# EAGLE board Adafruit BMP388 (EAGLE 9.1.1)
REV: A
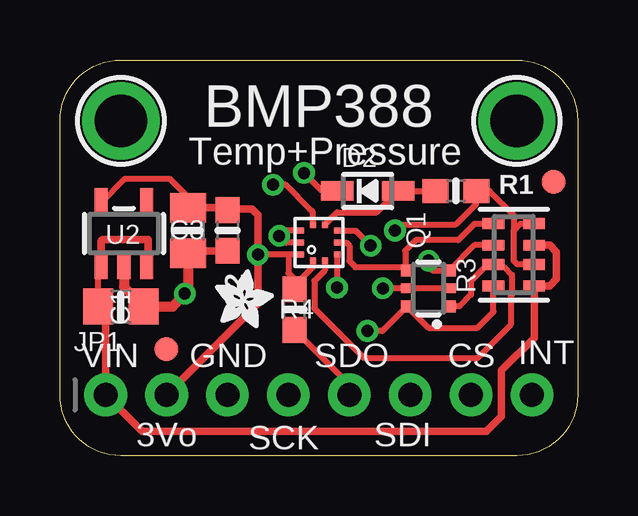
[diagram p0: board, top side]
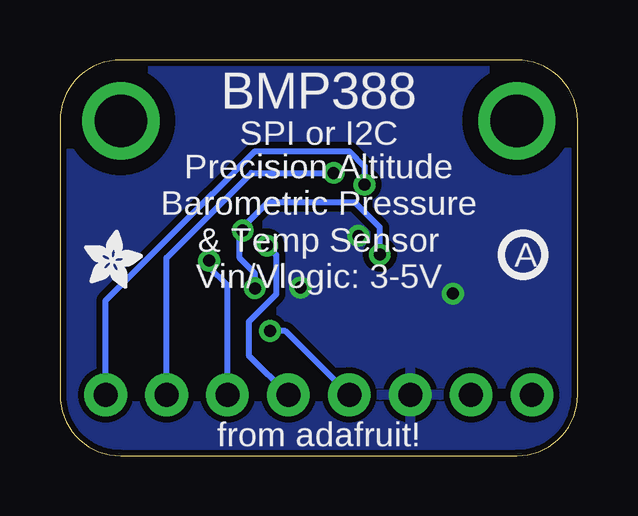
[diagram p1: board, bottom side, seen from below]

Size 21.59 x 16.51 mm. Coordinates in mm from the lower left corner, seen from the top.
Outline: 2.54,16.51 19.05,16.51 arc-90 21.59,13.97 21.59,2.54 arc-90 19.05,0 2.54,0 arc-90 0,2.54 0,13.97 arc-90 2.54,16.51
Copper layers (1*16): Top 0.035mm / dielectric 1.5mm / Bottom 0.035mm
Design rules "adafruit *": minimum track width 8mil, minimum drill 15.5mil, track to track 8mil, track to pad 8mil, pad to pad 8mil, via to via 8mil, smd to smd 8mil, copper to edge 10mil, drill to drill 8mil, minimum pad ring 10mil, minimum via ring 8mil, stop-mask expansion 2mil, vias tented up to drill 20mil, thermal gap 10mil

## Footprints (pad centres in the part's own frame; a part is rotated, then mirrored left to right if it is on the bottom)
0805-NO = smd 1.24 x 1.5: 1 -0.95,0; 2 0.95,0
0603-NO = smd 1.075 x 1: 1 -0.85,0; 2 0.85,0
SOD-323 = smd 1.35 x 0.8: A 1.27,0; C -1.27,0
BMP388 = smd 0.25 x 0.275: 1 0.25,0.75; 2 -0.25,0.75; 6 -0.25,-0.75; 7 0.25,-0.75 | smd 0.275 x 0.25: 3 -0.762,0.5; 4 -0.762,0; 5 -0.762,-0.5; 8 0.762,-0.5; 9 0.762,0; 10 0.762,0.5
1X08_ROUND_70 = drill 1 pad 1.778: 1 -8.89,0; 2 -6.35,0; 3 -3.81,0; 4 -1.27,0; 5 1.27,0; 6 3.81,0; 7 6.35,0; 8 8.89,0
SOT363 = smd 0.5 x 0.5: 1 -0.75,-0.9; 3 0.75,-0.9; 4 0.75,0.9; 6 -0.75,0.9 | smd 0.4 x 0.5: 2 0,-0.9; 5 0,0.9
RESPACK_4X0603 = smd 0.45 x 0.9: 1 -1.3,-0.85; 2 -0.4,-0.85; 3 0.4,-0.85; 4 1.3,-0.85; 5 1.3,0.85; 6 0.4,0.85; 7 -0.4,0.85; 8 -1.3,0.85
SOT23-5 = smd 0.55 x 1.2: 1 -0.95,-1.3; 2 0,-1.3; 3 0.95,-1.3; 4 0.95,1.3; 5 -0.95,1.3
FIDUCIAL_1MM = smd 1 x 1: 1 0,0
MOUNTINGHOLE_2.0_PLATED = drill 2.2 pad 3: P$1 0,0

## Placement (x,y rotation side)
C1  10uF  [0805-NO]  2.54,6.22 0 top
C2  0.1uF  [0603-NO]  6.99,9.4 270 top
C3  10uF  [0805-NO]  5.33,9.4 270 top
D2  1N4148  [SOD-323]  12.83,11.05 0 top
IC1  BMP388  [BMP388]  10.79,8.89 180 top
JP1  [1X08_ROUND_70]  10.79,2.54 0 top
Q1  2N7002D  [SOT363]  15.37,6.99 90 top
R1  10K  [0603-NO]  16.51,11.05 0 top
R3  10K  [RESPACK_4X0603]  18.92,8.38 90 top
R4  10K  [0603-NO]  9.78,6.1 90 top
U2  MIC5225-3.3  [SOT23-5]  2.67,9.27 0 top
U$2  [ADAFRUIT_2.5MM]  20.57,6.99 0 bottom
U$5  FIDUCIAL_1MM  [FIDUCIAL_1MM]  4.45,4.45 0 top
U$6  [ADAFRUIT_2.5MM]  6.48,5.33 0 top
U$7  MOUNTINGHOLE2.0  [MOUNTINGHOLE_2.0_PLATED]  2.54,13.97 0 top
U$8  MOUNTINGHOLE2.0  [MOUNTINGHOLE_2.0_PLATED]  19.05,13.97 0 top
U$15  FIDUCIAL_1MM  [FIDUCIAL_1MM]  20.57,11.43 0 top
U$20  [PCBFEAT-REV-040]  2.29,8.38 0 bottom

## Library data of the parts
C1-C3 D2 IC1 JP1 Q1 R1 R3 R4 U2 U$2 U$6 U$20 = microbuilder
U$5 U$7 U$8 U$15 = microbuilder; BOM: EXCLUDE

## Nets
3.3V: C2.1 C3.1 IC1.1 IC1.10 JP1.2 Q1.2 Q1.5 R1.2 R3.2 R3.4 R4.2 U2.5
CS: D2.C JP1.7
CS_3V: D2.A IC1.6 R1.1
GND: C1.2 C2.2 C3.2 IC1.3 IC1.8 IC1.9 JP1.3 U2.2
INT: IC1.7 JP1.8
SCK/SCL: JP1.4 Q1.6 R3.8
SCK_3V: IC1.2 Q1.1 R3.7
SDI/SDA: JP1.6 Q1.3 R3.6
SDI_3V: IC1.4 Q1.4 R3.5
SDO/ADR: IC1.5 JP1.5 R4.1
VIN: C1.1 JP1.1 R3.1 R3.3 U2.1 U2.3

## Tracks (layer width: path | path; a pad name or v marks a point on that pad's centre or on a via)
3.3V  (via drill 0.5)
  Top 0.254: U2.5 2.7,11.56 4.57,11.56 5.33,10.79 5.33,10.16 C3.1 | IC1.10 9.53,8.39 | 9.53,8.39 9.53,7.62 9.78,7.37 R4.2 9.78,7.11 10.54,7.88 IC1.1 | Q1.2 Q1.5 v13.46,6.99 | R3.2 19.07,7.98 18.92,8.13 18.92,9.4 | 18.92,9.4 19.21,9.68 R3.4 | 18.92,9.4 18.92,10.03 17.91,11.05 R1.2 17.36,10.5 16.51,9.65 14.11,9.65 13.97,9.51 v13.97,9.4 | IC1.1 arc-45 IC1.1 | 9.53,8.39 v8.26,8.39
  Top 0.305: C3.1 6.88,10.35 | 6.88,10.35 C2.1 | 8.26,6.99 8.26,6.35 JP1.2 | 8.26,6.99 v8.26,8.39 8.26,10.03 8,10.29 6.95,10.29 6.88,10.35 | 8.26,6.99
  Bottom 0.254: v13.46,6.99 13.46,7.61 14.1,8.24 14.1,9.27 v13.97,9.4 13.97,9.53 12.93,10.56 9.29,10.56 8.26,9.53 v8.26,8.39
CS  (via drill 0.5)
  Top 0.254: v10.17,11.8 10.92,11.05 D2.C
  Bottom 0.254: JP1.7 17.14,8.26 13.6,11.8 v10.17,11.8
CS_3V
  Top 0.254: R1.1 D2.A 13.2,10.15 11.55,10.15 IC1.6
GND  (via drill 0.5)
  Top 0.254: IC1.8 9.36,9.39 v9.14,9.17 9.43,8.89 IC1.9 | IC1.3 v11.56,7.01
  Top 0.305: C2.2 5.43,8.55 C3.2
  Top 0.406: U2.2 2.67,7.05 C1.2 4.7,6.22 5.21,6.73 | 5.21,6.73 v5.21,6.76 | C3.2 5.33,6.86 5.21,6.73
  pour Bottom (isolate 0.254): 0.06,16.51 21.59,16.51 21.61,0 0.06,0
INT  (via drill 0.5)
  Top 0.254: IC1.7 10.54,10.16 10.41,10.29 9.4,11.3 v8.89,11.3
  Bottom 0.254: JP1.8 19.68,6.48 15.62,10.54 15.24,10.92 15.23,10.92 13.45,12.7 9.53,12.7 8.89,12.06 v8.89,11.3
SCK/SCL  (via drill 0.5)
  Top 0.254: v12.83,5.21 13.44,5.21 Q1.6 15.37,5.33 17.4,5.33 18.07,6.01 R3.8
  Bottom 0.254: JP1.4 12.19,5.21 v12.83,5.21
SCK_3V
  Top 0.254: 18.85,6.72 18.8,6.66 18.8,5.46 17.4,4.06 12.7,4.06 10.61,6.16 10.61,7.3 11.04,7.73 IC1.2 | 18.85,6.72 18.85,7.55 18.53,7.87 18.18,7.87 R3.7 17.83,7.98 17.14,7.3 17.14,6.72 16.66,6.24 Q1.1 | 18.85,6.72 arc-45 18.85,6.72
SDI/SDA  (via drill 0.5)
  Top 0.254: R3.6 17.29,8.78 16.27,7.76 Q1.3 15.52,7.74 15.37,7.88 v15.37,8.14
  Bottom 0.254: JP1.6 14.61,7.11 15.37,7.88 v15.37,8.14
SDI_3V
  Top 0.254: R3.5 17.3,9.68 16.61,8.99 14.84,8.99 14.4,8.56 14.4,7.8 | 14.4,7.8 14.33,7.87 12.32,7.87 12.07,8.13 12.07,8.76 11.94,8.89 IC1.4 | 14.4,7.8 Q1.4
SDO/ADR  (via drill 0.5)
  Top 0.254: IC1.5 12.33,9.39 v12.95,8.76 | R4.1 12.06,2.96 JP1.5 | v12.95,8.76
  Bottom 0.254: JP1.5 13.72,4.19 13.72,5.59 12.57,6.73 12.57,8.38 v12.95,8.76
VIN
  Top 0.254: 1.91,5.91 C1.1 1.59,7.84 U2.1 | 3.68,8.04 U2.3
  Top 0.305: 1.91,5.91 JP1.1 3.43,1.02 17.78,1.02 18.41,1.65 18.41,3.56 19.77,4.91 R3.1 20.42,7.08 20.7,7.37 20.7,8.51 20.43,8.78 R3.3 | U2.1 1.72,8.96 1.78,9.02 3.68,9.02 3.68,8.04

## Text on the board
tPlace: BMP388 | Temp+Pressure | VIN | GND | SDO | CS | INT | 3Vo | SCK | SDI
bPlace: BMP388 | SPI or I2C | Precision Altitude / Barometric Pressure / & Temp Sensor | Vin/Vlogic: 3-5V | from adafruit!